# Altium PCB PCB_3636_v3.pcbdoc
Units mil, origin at the board's own origin, x right, y up, seen from the top; angles counter-clockwise.
Board outline 2410 x 2240 mil, 2 copper layers (Top Layer, Bottom Layer); 82 components, 59 nets, 271 pads, 132 vias.
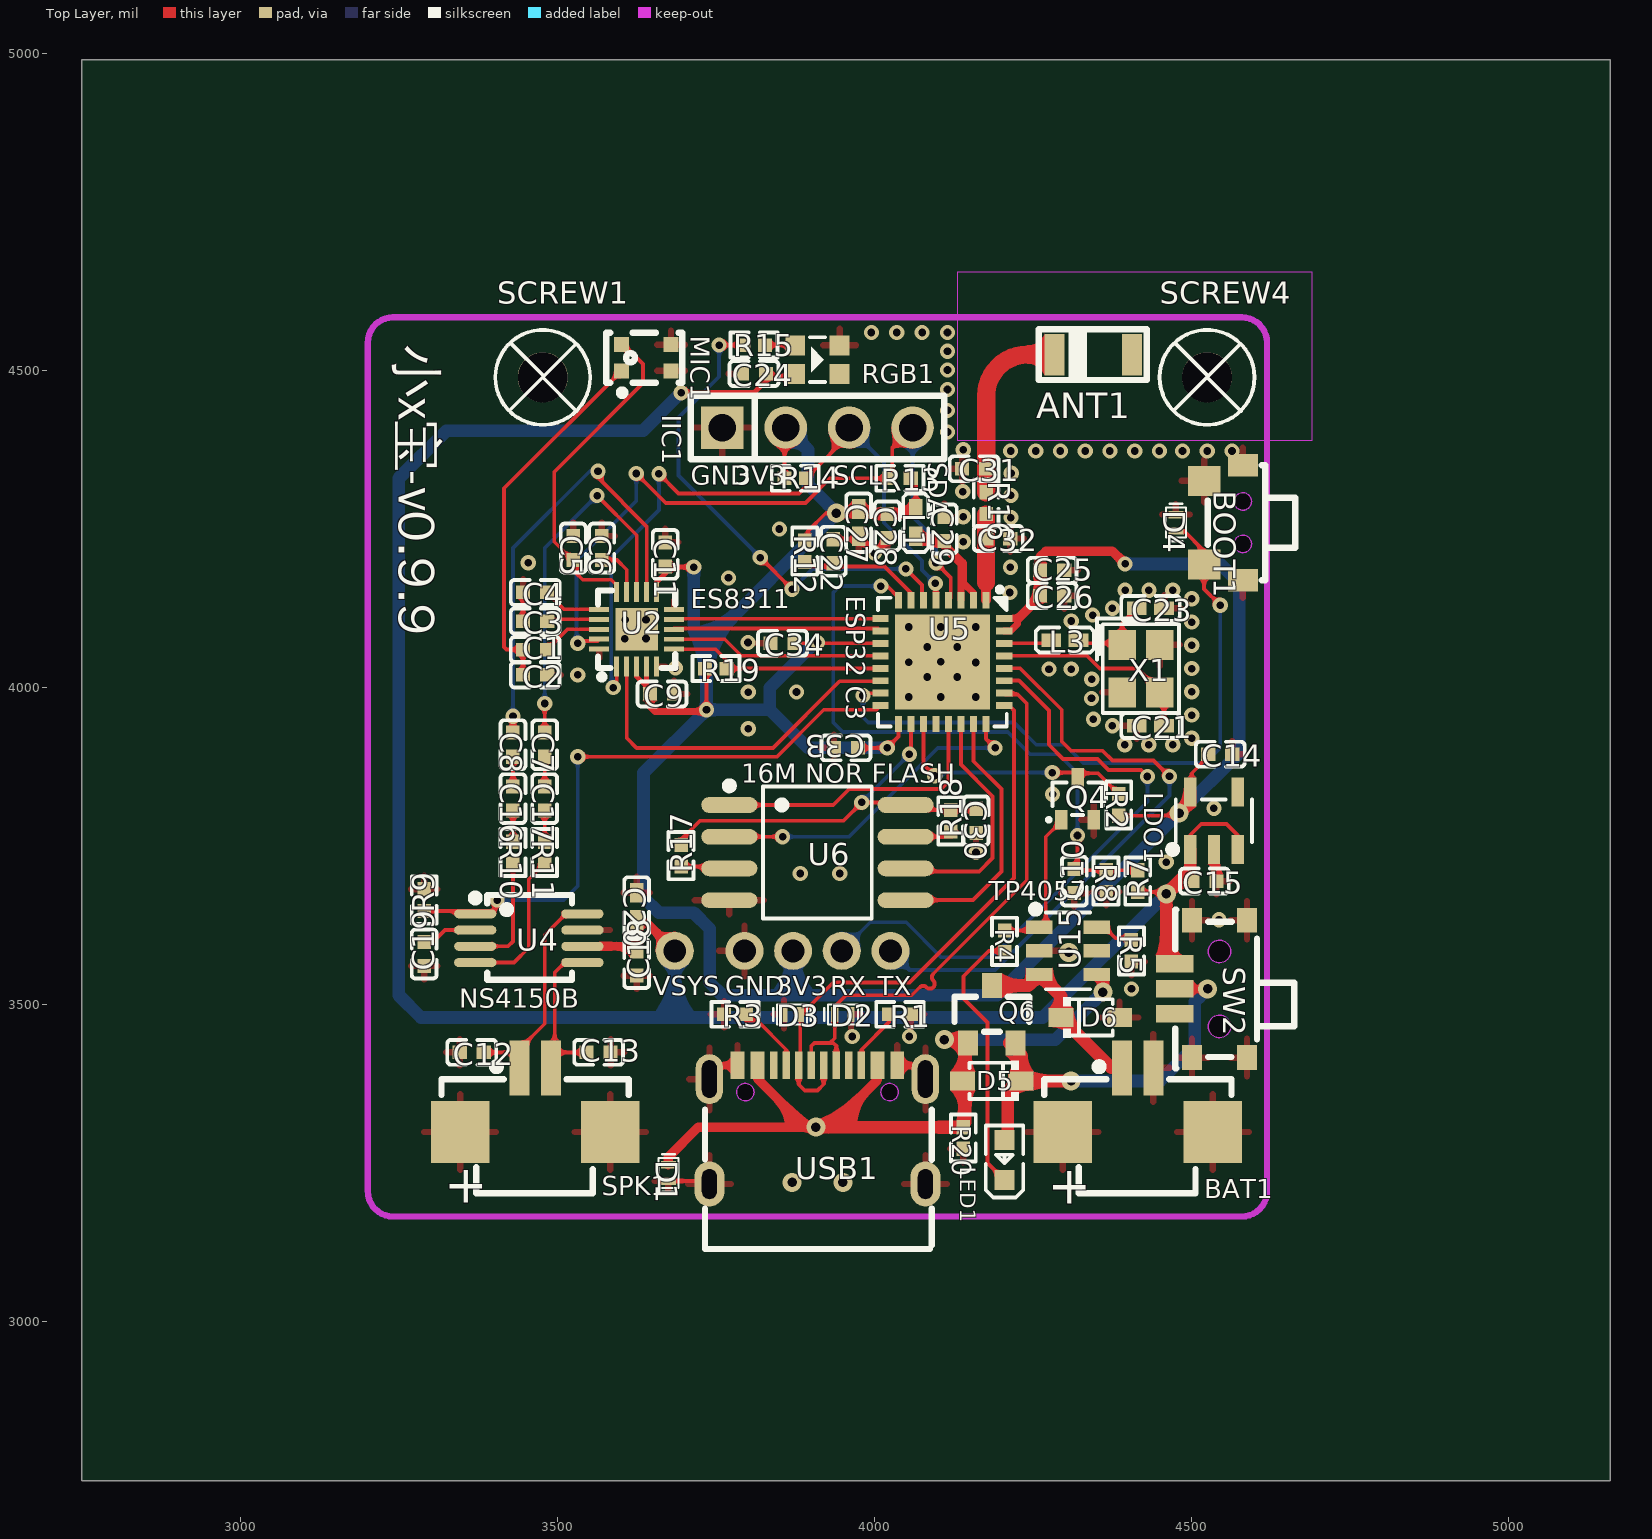
[diagram p0: Top Layer view]
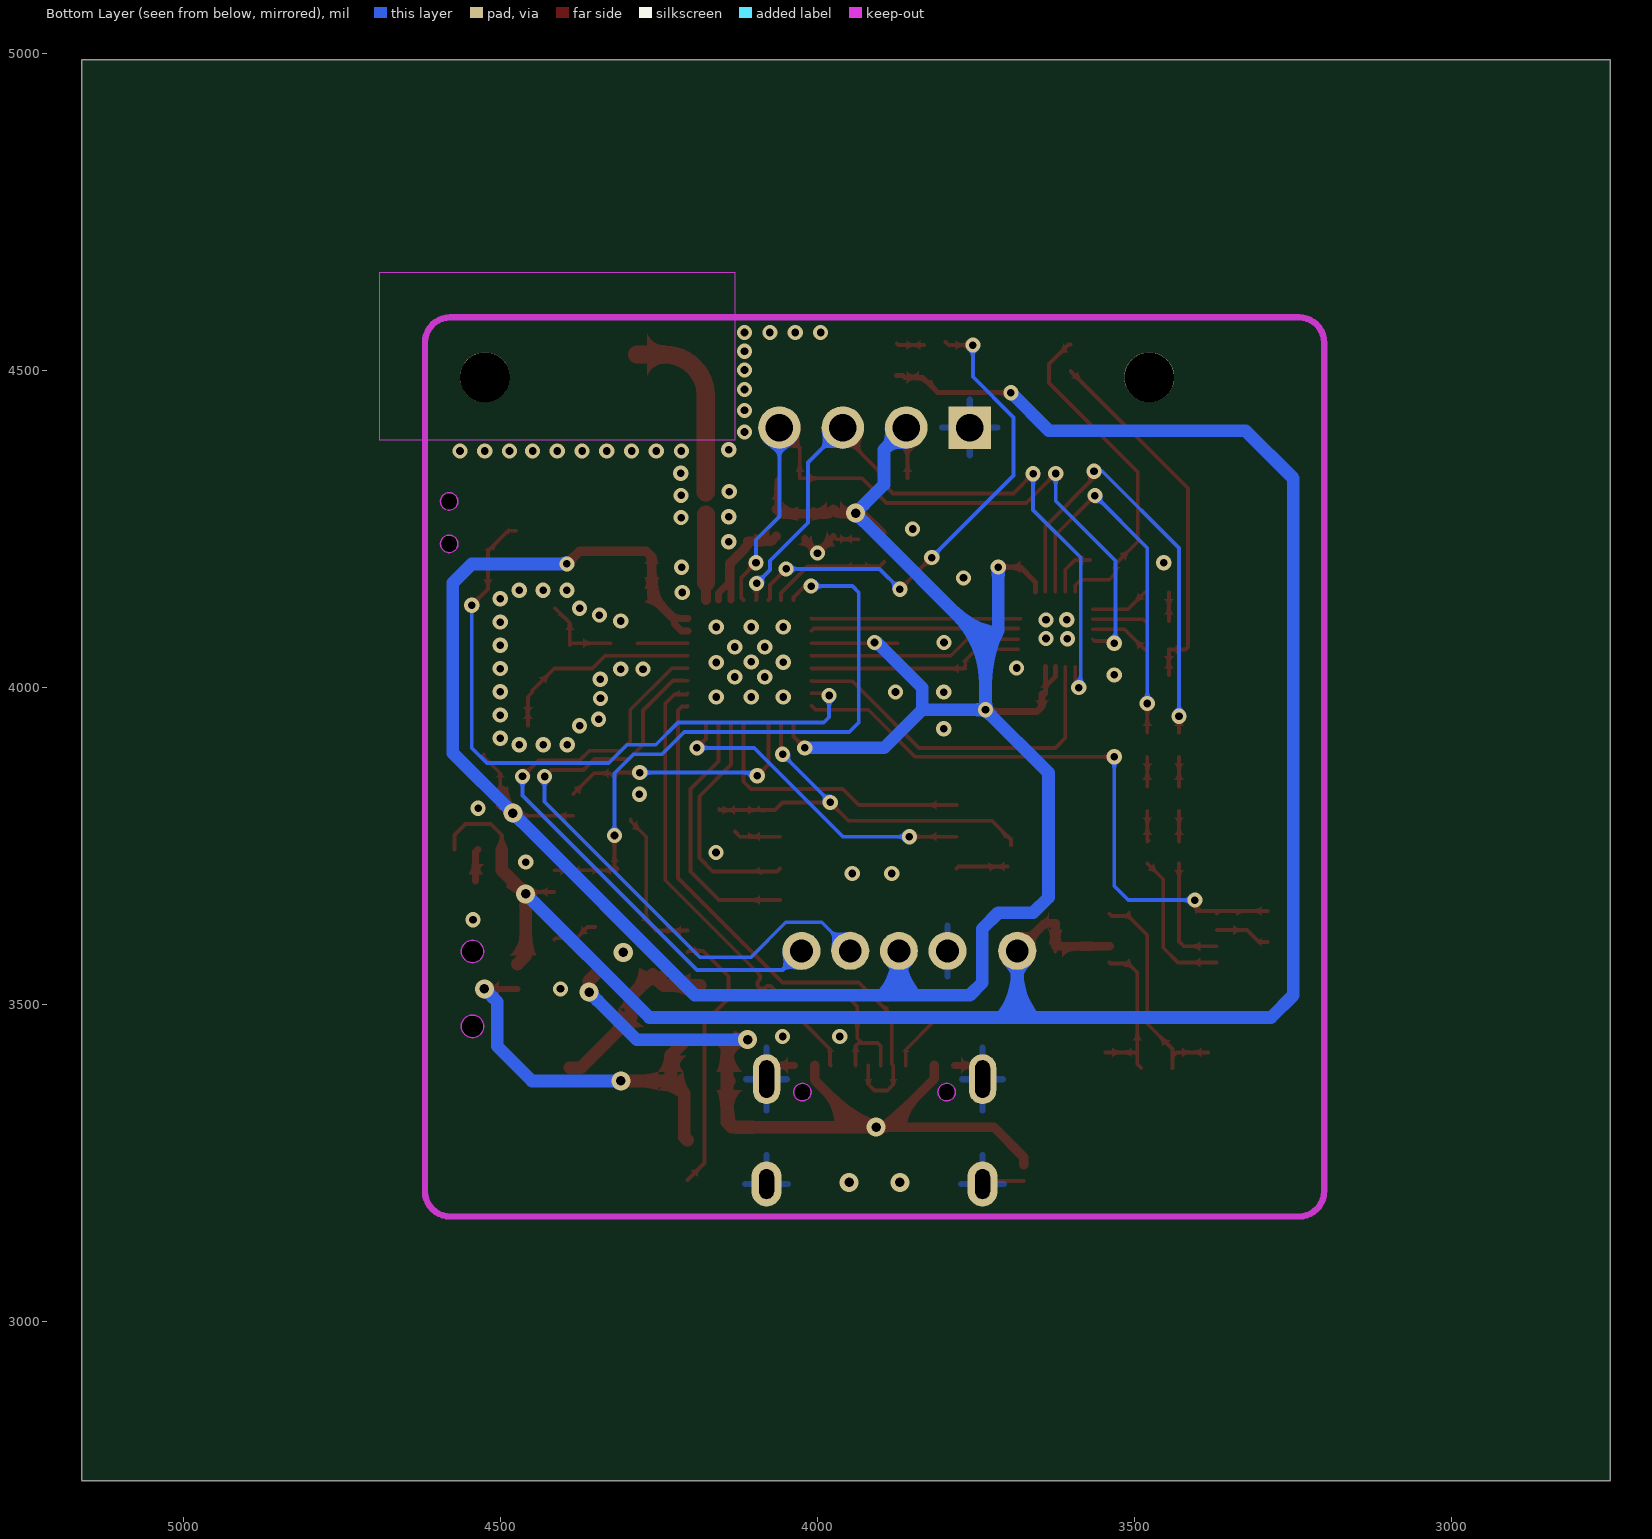
[diagram p1: Bottom Layer view, seen from below]

## Layer stack, top to bottom
Top Layer: signal copper (thickness not stored)
Dielectric: dielectric 12.6, FR-4, Dk 4.8
Bottom Layer: signal copper (thickness not stored)

## Board outline
5160,2750 2750,2750 2750,4990 5160,4990

## Design rules (kind name [scope] priority, off if disabled: settings)
BoardOutlineClearance copperThickness1oz [All] p0: genericclearance=10 ignorepadtopadclearanceinfootprint=FALSE except(0: Arc-SplitContinuation Track-SplitContinuation SMDPad-SplitContinuation THPad-SplitContinuation Via-SplitContinuation Fill-SplitContinuation Poly-SplitContinuation Region-SplitContinuation Text-SplitContinuation; 6: Track-CutoutEdge SMDPad-CutoutEdge THPad-CutoutEdge Via-CutoutEdge Region-CutoutEdge; 11.8: Track-OutlineEdge SMDPad-OutlineEdge THPad-OutlineEdge Via-OutlineEdge Fill-OutlineEdge Region-OutlineEdge Poly-OutlineEdge Text-OutlineEdge Fill-CutoutEdge)
BoardOutlineClearance copperThickness2oz [All] p0: genericclearance=10 ignorepadtopadclearanceinfootprint=FALSE except(0: Arc-SplitContinuation Track-SplitContinuation SMDPad-SplitContinuation THPad-SplitContinuation Via-SplitContinuation Fill-SplitContinuation Poly-SplitContinuation Region-SplitContinuation Text-SplitContinuation; 6: Track-CutoutEdge SMDPad-CutoutEdge THPad-CutoutEdge Via-CutoutEdge Region-CutoutEdge; 11.8: Track-OutlineEdge SMDPad-OutlineEdge THPad-OutlineEdge Via-OutlineEdge Fill-OutlineEdge Region-OutlineEdge Poly-OutlineEdge Text-OutlineEdge Fill-CutoutEdge)
Clearance copperThickness1oz [(InNet('$1N13116') OR InNet('GND') OR InNet('ESP_BOOT') OR InNet('$1N13093') OR InNet('$1N13159') OR InNet('$1N13092') OR InNet('$1N13091') OR InNet('VMIC') OR InNet('$1N13089') OR InNet('$1N13080') OR InNet('PA_IN-') OR InNet('$1N13079') OR InNet('PA_IN+') OR InNet('VDD_3V3') OR InNet('$1N13163') OR InNet('$1N13162') OR InNet('$1N13104') OR InNet('$1N13105') OR InNet('VSYS') OR InNet('$1N13099') OR InNet('$1N13026') OR InNet('CHIP_EN') OR InNet('$1N13175') OR InNet('$1N13022') OR InNet('$1N13025') OR InNet('ESP_VDD_SPI') OR InNet('USB_VBUS') OR InNet('SYS_I2C_SCL') OR InNet('SYS_I2C_SDA') OR InNet('$1N13174') OR InNet('$1N14091') OR InNet('$1N14095') OR InNet('VBAT') OR InNet('$1N12989') OR InNet('$1N12990') OR InNet('PA_EN') OR InNet('$1N13096') OR InNet('$1N13097') OR InNet('$1N13046') OR InNet('$1N13050') OR InNet('I2S_BCK') OR InNet('ESP_RGBLED') OR InNet('$1N14634') OR InNet('$1N14077') OR InNet('I2S_DO') OR InNet('I2S_WS') OR InNet('I2S_DI') OR InNet('I2S_MCK') OR InNet('ESP_SPICS0') OR InNet('ESP_SPICLK') OR InNet('ESP_SPID') OR InNet('ESP_SPIQ') OR InNet('USB_DN') OR InNet('USB_DP') OR InNet('ESP_U0RXD') OR InNet('ESP_U0TXD') OR InNet('ESP_BAT_ADC') OR InNet('ESP_BAT_CHRG') OR InNet('VOUT'))] p1: gap=7 ignorepadtopadclearanceinfootprint=FALSE except(4: Track-Track; 6: Track-SMDPad SMDPad-SMDPad Track-THPad SMDPad-THPad THPad-THPad Track-Via SMDPad-Via THPad-Via Via-Via SMDPad-Fill THPad-Fill Via-Fill Fill-Fill Track-Region SMDPad-Region THPad-Region Via-Region Region-Region Track-Poly SMDPad-Poly THPad-Poly Via-Poly Fill-Poly Region-Poly Poly-Poly Track-Text SMDPad-Text THPad-Text Via-Text Fill-Text Region-Text Poly-Text Text-Text; 6.9: Track-Hole SMDPad-Hole THPad-Hole Via-Hole Fill-Hole Region-Hole Poly-Hole Text-Hole Sheet-Hole; 11.8: Track-Fill Fill-Region Track-Sheet SMDPad-Sheet THPad-Sheet Via-Sheet Fill-Sheet Region-Sheet Poly-Sheet Text-Sheet)
Clearance copperThickness2oz [All] p1: gap=7 ignorepadtopadclearanceinfootprint=FALSE except(6: Track-SMDPad SMDPad-SMDPad Track-THPad SMDPad-THPad THPad-THPad Track-Via SMDPad-Via THPad-Via Via-Via SMDPad-Fill THPad-Fill Via-Fill Fill-Fill Track-Region SMDPad-Region THPad-Region Via-Region Region-Region Track-Poly SMDPad-Poly THPad-Poly Via-Poly Fill-Poly Region-Poly Poly-Poly Track-Text SMDPad-Text THPad-Text Via-Text Fill-Text Region-Text Poly-Text Text-Text; 6.9: Track-Hole SMDPad-Hole THPad-Hole Via-Hole Fill-Hole Region-Hole Poly-Hole Text-Hole Sheet-Hole; 8: Track-Track; 11.8: Track-Fill Fill-Region Track-Sheet SMDPad-Sheet THPad-Sheet Via-Sheet Fill-Sheet Region-Sheet Poly-Sheet Text-Sheet)
DiffPairsRouting differentialPair [All] p1: maxuncoupledlength=10 minlimit=6 maxlimit=6 mostfreqgap=6 toplayer_minwidth=5 toplayer_prefwidth=10 toplayer_maxwidth=100 bottomlayer_minwidth=5 bottomlayer_prefwidth=10 bottomlayer_maxwidth=100
PasteMaskExpansion pasteMaskExpansion [All] p1: expansion=0
PlaneConnect innerPlane [All] p1: planeconnectstyle=Relief reliefexpansion=20 reliefentries=4 reliefconductorwidth=10 reliefairgap=10
PolygonConnect copperRegion [All] p1: connectstyle=Relief reliefentries=4 reliefconductorwidth=10 polygonreliefangle="90 Angle" airgapwidth=10
RoutingVias viaSize [All] p1: viastyle="Through Hole" holewidth=12 minholewidth=11.8 maxholewidth=248 width=24 minwidth=19.7 maxwidth=393.7
SolderMaskExpansion solderMaskExpansion [All] p1: useseparateexpansions=TRUE expansion=2 expansionbottom=2
Width copperThickness1oz [All] p1: maxlimit=100 minlimit=5 preferedwidth=6
Width copperThickness2oz [All] p1: maxlimit=100 minlimit=8 preferedwidth=10

## Components (designator, comment, footprint, x,y, rotation, side; value= is the part's Value field where it differs from the comment)
ANT1 "RFANT3216120A5T" FILTER-SMD_1206-2P-L3.2-W1.6-L 4345,4525 r0 top
BAT1 "HC-1.25-2PWT" CONN-SMD_2P-P1.25-HC-1.25-2PWT 4415,3350 r0 top locked
BOOT1 "TS24CA" SW-SMD_TS24CA 4550,4260 r270 top
C1 "CL05A105KA5NQNC" C0402#1 3465,4060 r0 top
C2 "CL05B104KO5NNNC" C0402#1 3465,4020 r180 top
C3 "CL05A105KA5NQNC" C0402#1 3465,4105 r0 top
C4 "CL05A105KA5NQNC" C0402#1 3465,4150 r0 top
C5 "CL05A105KA5NQNC" C0402#1 3525,4220 r270 top
C6 "CL05A105KA5NQNC" C0402#1 3570,4220 r270 top
C7 "CL05A105KA5NQNC" C0402#1 3480,3910 r90 top
C8 "CL05A105KA5NQNC" C0402#1 3430,3910 r90 top
C9 "CL05B104KO5NNNC" C0402#1 3665,3990 r180 top
C10 "CL05B104KO5NNNC" C0402#1 4315,3695 r90 top
C11 "CL05A105KA5NQNC" C0402#1 3670,4210 r270 top
C12 "0402B102K500NT" C0402#1 3365,3425 r180 top
C13 "0402B102K500NT" C0402#1 3565,3425 r0 top
C14 "CL05A105KA5NQNC" C0402#1 4545,3895 r180 top
C15 "CL05A105KA5NQNC" C0402#1 4520,3695 r0 top
C16 "CL05B104KO5NNNC" C0402#1 3430,3825 r270 top
C17 "CL05B104KO5NNNC" C0402#1 3480,3825 r270 top
C18 "CL05A105KA5NQNC" C0402#1 3625,3565 r90 top
C19 "CL05A105KA5NQNC" C0402#1 3290,3580 r90 top
C20 "CL05A106MQ5NUNC" C0402#2 3625,3655 r270 top
C21 "CL05C100JB5NNNC" C0402#2 4435,3940 r180 top
C22 "CL05B104KO5NNNC" C0402#1 3935,4215 r90 top
C23 "CL05C100JB5NNNC" C0402#2 4435,4125 r0 top
C24 "CL05B104KO5NNNC" C0402#1 3810,4495 r0 top
C25 "CL05A105KA5NQNC" C0402#1 4280,4185 r0 top
C26 "CL05B104KO5NNNC" C0402#1 4280,4145 r0 top
C27 "CL05A106MQ5NUNC" C0402#2 3975,4260 r90 top
C28 "CL05B104KO5NNNC" C0402#1 4020,4255 r270 top
C29 "CL05B104KO5NNNC" C0402#1 4110,4250 r90 top
C30 "CL05A105KA5NQNC" C0402#1 4160,3790 r90 top
C31 "CL05B104KO5NNNC" C0402#1 4157,4345 r180 top
C32 "CL05B104KO5NNNC" C0402#1 4195,4235 r0 top
C33 "CL05B104KO5NNNC" C0402#1 3955,3905 r180 top
C34 "CL05B104KO5NNNC" C0402#1 3855,4070 r180 top
D1 "H5VL10B" SOD-882_L1.0-W0.6-BI 3675,3235 r270 top
D2 "H5VL10B" SOD-882_L1.0-W0.6-BI 3950,3485 r0 top
D3 "H5VL10B" SOD-882_L1.0-W0.6-BI 3870,3485 r180 top
D4 "H5VL10B" SOD-882_L1.0-W0.6-BI 4475,4260 r90 top
D5 "1N5819WS_C191023" SOD-323_L1.8-W1.3-LS2.5-RD 4185,3380 r180 top
D6 "1N5819WS_C191023" SOD-323_L1.8-W1.3-LS2.5-RD 4340,3480 r0 top
IIC1 "PZ254V-11-04P" HDR-TH_4P-P2.54-V-M 3910,4410 r0 top
L1 "LQG15HS2N0S02D" L0402 4065,4260 r270 top
L3 "SDCL1005C24NJTDF" L0402-RD 4300,4075 r180 top
LDO1 "RT9013-33GB" SOT-23-5_L3.0-W1.7-P0.95-LS2.8-BL 4535,3790 r0 top
LED1 "KT-0603R" LED0603-RD 4205,3255 r90 top
MIC1 "ZTS6216" MIC-SMD_4P-L2.8-W1.9-P1.84-TL 3640,4520 r90 top
Q4 "SI1304BDL" SOT-323-3_L2.0-W1.3-P1.30-LS2.1-BL 4320,3825 r0 top
Q6 "AO3401A_C347476" SOT-23_L2.9-W1.3-P1.90-LS2.4-BR 4185,3485 r270 top
R1 "0402WGF5101TCE" R0402 4040,3485 r0 top
R2 "0402WGF1004TCE" R0402 4385,3815 r90 top
R3 "0402WGF5101TCE" R0402 3780,3485 r180 top
R4 "0402WGF1002TCE" R0402 4205,3600 r90 top
R5 "0402WGF5101TCE" R0402 4405,3585 r270 top
R7 "0402WGF1003TCE" R0402 4415,3695 r90 top
R8 "0402WGF1003TCE" R0402 4365,3695 r270 top
R9 "0402WGF1002TCE" R0402 3290,3665 r90 top
R10 "0402WGF1003TCE" R0402 3430,3740 r90 top
R11 "0402WGF1003TCE" R0402 3480,3740 r90 top
R12 "0402WGF1002TCE" R0402 3890,4215 r270 top
R13 "0402WGF2201TCE" R0402 4040,4330 r0 top
R14 "0402WGF2201TCE" R0402 3875,4330 r180 top
R15 "0402WGF5100TCE" R0402 3810,4540 r180 top
R16 "0402WGF0000TCE" R0402 4176,4291 r270 top
R17 "0402WGF1003TCE" R0402 3695,3735 r90 top
R18 "0402WGF1003TCE" R0402 4120,3790 r90 top
R19 "0402WGF1002TCE" R0402 3750,4030 r0 top
R20 "0402WGF1003TCE" R0402 4140,3290 r270 top
RGB1 "XL-0807RGBC-WS2812B" LED-SMD_4P-L2.0-W1.8_CY-0807 3910,4517 r180 top
SCREW1 "M2螺丝" M2螺丝 3476.93,4489.17 r0 top
SCREW4 "M2螺丝" M2螺丝 4524.17,4489.17 r0 top
SPK1 "HC-1.25-2PWT" CONN-SMD_2P-P1.25-HC-1.25-2PWT 3465,3350 r0 top locked
SW2 "MINI MSK12CO2" SW-SMD_MSK12CO2 4530,3525 r90 top
U2 "ES8311" WQFN-20_L3.0-W3.0-P0.40-BL-EP1.7 3625,4092 r0 top
U4 "NS4150B_C189961" MSOP-8_L3.0-W3.0-P0.65-LS5.0-BL 3455,3605 r270 top
U5 "ESP32-C3" QFN-32_L5.0-W5.0-P0.50-TL-EP3.7 4106.85,4040.35 r270 top
U6 "W25Q128JVSIQ" SOIC-8_L5.3-W5.3-P1.27-LS8.0-BL 3910,3740 r270 top
U15 "TP4057-MS" SOT-23-6_L2.9-W1.6-P0.95-LS2.8-BL 4305,3585 r270 top
USB1 "TYPE-C 16PIN 2MD(073)" USB-C-SMD_TYPE-C-6PIN-2MD-073 3910,3310.94 r0 top locked
X1 "X252040MMB4SI" CRYSTAL-SMD_4P-L2.5-W2.0-BL 4420,4030 r270 top

## Footprints (in the part's own frame and the unit in brackets; to place one, negate y for a bottom-side part, rotate by r counter-clockwise, add the part's x,y. Pads: shape width x height; smd on the part's side, far side on the other; paste and mask are expansions set on the pad)
C0402#1 [mm]
  rect 0.566x0.54 smd: 1(-0.482,0) 2(0.482,0)
  silkscreen extent -0.98,-0.5 0.98,0.5
C0402#2 [mm]
  rect 0.79x0.54 smd: 1(-0.545,0) 2(0.545,0)
  silkscreen extent -1.17,-0.5 1.17,0.5
CONN-SMD_2P-P1.25-HC-1.25-2PWT [mm]
  rect 0.8x2.2 smd: 1(-0.625,1.285) 2(0.625,1.285)
  rect 2.35x2.5 smd: 3(-3.005,-1.285) 4(3.005,-1.285)
  silkscreen extent -3.75,-3.73 3.75,1.48
CRYSTAL-SMD_4P-L2.5-W2.0-BL [mm]
  rect 1.2x1.1 smd: 1(-0.95,-0.75) 2(0.95,-0.75) 3(0.95,0.75) 4(-0.95,0.75)
  silkscreen extent -2.01,-1.76 1.78,1.53
FILTER-SMD_1206-2P-L3.2-W1.6-L [mm]
  rect 0.8x1.66 smd: 1(-1.55,0) 2(1.55,0)
  silkscreen extent -2.19,-1.02 2.13,1.02
HDR-TH_4P-P2.54-V-M [mm]
  rect 1.7x1.7 hole 1.1: 1(-3.81,0)
  round 1.7 hole 1.1: 2(-1.27,0) 3(1.27,0) 4(3.81,0)
  silkscreen extent -5.08,-1.27 5.08,1.27
L0402 [mm]
  rect 0.79x0.54 smd: 1(-0.545,0) 2(0.545,0)
  silkscreen extent -1.17,-0.5 1.17,0.5
L0402-RD [mm]
  rect 0.79x0.54 smd: 1(-0.545,0) 2(0.545,0)
  silkscreen extent -1.4,-0.57 1.17,0.57
LED0603-RD [mm]
  rect 0.8x0.8 smd: 1(-0.799,0) 2(0.799,0)
  silkscreen extent -1.49,-0.75 1.39,0.76
LED-SMD_4P-L2.0-W1.8_CY-0807 [mm]
  rect 0.8x0.8 smd: 1(0.889,0.575) 2(-0.889,0.575) 3(-0.889,-0.575) 4(0.889,-0.575)
  silkscreen extent -0.31,-0.9 0.31,0.9
M2螺丝 [mm]
  round 2 hole 2: 1(0,0)
  silkscreen extent -1.9,-1.9 1.9,1.9
MIC-SMD_4P-L2.8-W1.9-P1.84-TL [mm]
  rect 0.6x0.6 smd: 1(-0.525,0.995) 2(-0.525,-0.995) 3(0.525,-0.995) 4(0.525,0.995)
  silkscreen extent -1.52,-1.45 1,1.6
MSOP-8_L3.0-W3.0-P0.65-LS5.0-BL [mil]
  oval 14.33x66.61 smd: 1(-38.39,-84.49) 2(-12.79,-84.49) 3(12.8,-84.49) 4(38.39,-84.49) 5(38.39,84.49) 6(12.8,84.49) 7(-12.79,84.49) 8(-38.39,84.49)
  silkscreen extent -69,-90 65,68
QFN-32_L5.0-W5.0-P0.50-TL-EP3.7 [mm]
  rect 0.65x0.28 smd: 1(-2.478,1.75) 2(-2.478,1.25) 3(-2.478,0.75) 4(-2.478,0.25) 5(-2.478,-0.25) 6(-2.478,-0.75) 7(-2.478,-1.25) 8(-2.478,-1.75) 17(2.478,-1.75) 18(2.478,-1.25) 19(2.478,-0.75) 20(2.478,-0.25) 21(2.478,0.25) 22(2.478,0.75) 23(2.478,1.25) 24(2.478,1.75)
  rect 0.28x0.65 smd: 9(-1.75,-2.478) 10(-1.25,-2.478) 11(-0.75,-2.478) 12(-0.25,-2.478) 13(0.25,-2.478) 14(0.75,-2.478) 15(1.25,-2.478) 16(1.75,-2.478) 25(1.75,2.478) 26(1.25,2.478) 27(0.75,2.478) 28(0.25,2.478) 29(-0.25,2.478) 30(-0.75,2.478) 31(-1.25,2.478) 32(-1.75,2.478)
  rect 3.8x3.8 smd: 33(0,0)
  silkscreen extent -3,-2.58 2.58,2.58
R0402 [mm]
  rect 0.566x0.54 smd: 1(-0.433,0) 2(0.433,0)
  silkscreen extent -0.94,-0.5 0.94,0.5
SOD-323_L1.8-W1.3-LS2.5-RD [mm]
  rect 1x0.75 smd: 1(-1.173,0) 2(1.173,0)
  silkscreen extent -1.08,-0.8 0.9,0.8
SOD-882_L1.0-W0.6-BI [mm]
  rect 0.3x0.6 smd: 1(-0.325,0) 2(0.325,0)
  silkscreen extent -0.75,-0.4 0.75,0.4
SOIC-8_L5.3-W5.3-P1.27-LS8.0-BL [mm]
  oval 0.63x2.25 smd: 1(-1.905,-3.53) 2(-0.635,-3.53) 3(0.635,-3.53) 4(1.905,-3.53) 5(1.905,3.53) 6(0.635,3.53) 7(-0.635,3.53) 8(-1.905,3.53)
  silkscreen extent -2.82,-3.68 2.64,2.18
SOT-23-5_L3.0-W1.7-P0.95-LS2.8-BL [mm]
  rect 0.49x1.157 smd: 1(-0.95,-1.154) 2(0,-1.154) 3(0.95,-1.154)
  rect 0.49x1.175 smd: 4(0.95,1.154) 5(-0.95,1.154)
  silkscreen extent -1.8,-1.29 1.53,0.85
SOT-23-6_L2.9-W1.6-P0.95-LS2.8-BL [mil]
  rect 20.95x42.2 smd: 1(-37.4,-45.24) 2(0,-45.24) 3(37.4,-45.24) 4(37.4,45.24) 5(0,45.24) 6(-37.4,45.24)
  silkscreen extent -72,-57 61,35
SOT-23_L2.9-W1.3-P1.90-LS2.4-BR [mm]
  rect 1x0.8 smd: 1(1.15,-0.95) 2(1.15,0.95) 3(-1.15,0)
  silkscreen extent -0.7,-1.5 0.7,1.5
SOT-323-3_L2.0-W1.3-P1.30-LS2.1-BL [mm]
  rect 0.5x0.78 smd: 1(-0.65,-0.84) 2(0.65,-0.84) 3(0,0.84)
  silkscreen extent -1.22,-0.93 1,0.65
SW-SMD_MSK12CO2 [mm]
  rect 0.7x1.5 smd: 1(-1,1.45) 2(0,1.45) 3(1,1.45)
  rect 1x0.8 smd: 4(-2.75,-1.45) 4(-2.75,0.75) 5(2.75,-1.45) 5(2.75,0.75)
  Board Outline Layer circle w0.005: c-1.5,-0.35 r0.45
  Board Outline Layer circle w0.005: c1.5,-0.35 r0.45
  Board Outline Layer region: -1.5,-0.8 -1.695,-0.755 -1.852,-0.631 -1.939,-0.45 -1.939,-0.25 -1.852,-0.069 -1.695,0.055 -1.5,0.1 -1.5,0.1 -1.305,0.055 -1.148,-0.069 -1.061,-0.25 -1.061,-0.45 -1.148,-0.631 -1.305,-0.755 -1.5,-0.8
  Board Outline Layer region: 1.5,-0.8 1.305,-0.755 1.148,-0.631 1.061,-0.45 1.061,-0.25 1.148,-0.069 1.305,0.055 1.5,0.1 1.5,0.1 1.695,0.055 1.852,-0.069 1.939,-0.25 1.939,-0.45 1.852,-0.631 1.695,-0.755 1.5,-0.8
  Multi-Layer board cut-out: -1.5,-0.8 -1.695,-0.755 -1.852,-0.631 -1.939,-0.45 -1.939,-0.25 -1.852,-0.069 -1.695,0.055 -1.5,0.1 -1.5,0.1 -1.305,0.055 -1.148,-0.069 -1.061,-0.25 -1.061,-0.45 -1.148,-0.631 -1.305,-0.755 -1.5,-0.8
  Multi-Layer board cut-out: 1.5,-0.8 1.305,-0.755 1.148,-0.631 1.061,-0.45 1.061,-0.25 1.148,-0.069 1.305,0.055 1.5,0.1 1.5,0.1 1.695,0.055 1.852,-0.069 1.939,-0.25 1.939,-0.45 1.852,-0.631 1.695,-0.755 1.5,-0.8
  silkscreen extent -3.17,-3.35 3.17,1.43
SW-SMD_TS24CA [mm]
  rect 0.9x1.2 smd: 1(-2.3,0.775) 2(2.3,0.775)
  rect 1.2x1.3 smd: 3(-1.675,-0.775) 4(1.675,-0.775)
  Board Outline Layer circle w0.005: c-0.85,0.775 r0.35
  Board Outline Layer circle w0.005: c0.85,0.775 r0.35
  Board Outline Layer region: -0.85,1.125 -0.698,1.09 -0.576,0.993 -0.509,0.853 -0.509,0.697 -0.576,0.557 -0.698,0.46 -0.85,0.425 -0.85,0.425 -1.002,0.46 -1.124,0.557 -1.191,0.697 -1.191,0.853 -1.124,0.993 -1.002,1.09 -0.85,1.125
  Board Outline Layer region: 0.85,1.125 1.002,1.09 1.124,0.993 1.191,0.853 1.191,0.697 1.124,0.557 1.002,0.46 0.85,0.425 0.85,0.425 0.698,0.46 0.576,0.557 0.509,0.697 0.509,0.853 0.576,0.993 0.698,1.09 0.85,1.125
  Multi-Layer board cut-out: -0.85,1.125 -0.698,1.09 -0.576,0.993 -0.509,0.853 -0.509,0.697 -0.576,0.557 -0.698,0.46 -0.85,0.425 -0.85,0.425 -1.002,0.46 -1.124,0.557 -1.191,0.697 -1.191,0.853 -1.124,0.993 -1.002,1.09 -0.85,1.125
  Multi-Layer board cut-out: 0.85,1.125 1.002,1.09 1.124,0.993 1.191,0.853 1.191,0.697 1.124,0.557 1.002,0.46 0.85,0.425 0.85,0.425 0.698,0.46 0.576,0.557 0.509,0.697 0.509,0.853 0.576,0.993 0.698,1.09 0.85,1.125
  silkscreen extent -2.3,-0.62 2.3,2.88
USB-C-SMD_TYPE-C-6PIN-2MD-073 [mm]
  rect 0.55x1.1 smd: 1(-3.2,2.375) 2(-2.4,2.375) 11(2.4,2.375) 12(3.2,2.375)
  rect 0.3x1.1 smd: 3(-1.75,2.375) 4(-1.25,2.375) 5(-0.75,2.375) 6(-0.25,2.375) 7(0.25,2.375) 8(0.75,2.375) 9(1.25,2.375) 10(1.75,2.375)
  oval 1.2x1.8 hole 0.6 slot 1.2 at 90 deg: 13(-4.325,-2.375) 14(4.325,-2.375)
  oval 1.1x2 hole 0.6 slot 1.5 at 90 deg: 13(-4.325,1.825) 14(4.325,1.825)
  Board Outline Layer circle w0.005: c-2.89,1.305 r0.35
  Board Outline Layer circle w0.005: c2.89,1.305 r0.35
  Board Outline Layer region: -2.54,1.305 -2.575,1.153 -2.672,1.031 -2.812,0.964 -2.968,0.964 -3.108,1.031 -3.205,1.153 -3.24,1.305 -3.24,1.305 -3.205,1.457 -3.108,1.579 -2.968,1.646 -2.812,1.646 -2.672,1.579 -2.575,1.457 -2.54,1.305
  Board Outline Layer region: 3.24,1.305 3.205,1.153 3.108,1.031 2.968,0.964 2.812,0.964 2.672,1.031 2.575,1.153 2.54,1.305 2.54,1.305 2.575,1.457 2.672,1.579 2.812,1.646 2.968,1.646 3.108,1.579 3.205,1.457 3.24,1.305
  Multi-Layer board cut-out: -2.54,1.305 -2.575,1.153 -2.672,1.031 -2.812,0.964 -2.968,0.964 -3.108,1.031 -3.205,1.153 -3.24,1.305 -3.24,1.305 -3.205,1.457 -3.108,1.579 -2.968,1.646 -2.812,1.646 -2.672,1.579 -2.575,1.457 -2.54,1.305
  Multi-Layer board cut-out: 3.24,1.305 3.205,1.153 3.108,1.031 2.968,0.964 2.812,0.964 2.672,1.031 2.575,1.153 2.54,1.305 2.54,1.305 2.575,1.457 2.672,1.579 2.812,1.646 2.968,1.646 3.108,1.579 3.205,1.457 3.24,1.305
  silkscreen extent -4.5,-4.97 4.57,0.6
WQFN-20_L3.0-W3.0-P0.40-BL-EP1.7 [mm]
  rect 0.2x0.8 smd: 1(-0.8,-1.5) 2(-0.4,-1.5) 3(0,-1.5) 4(0.4,-1.5) 5(0.8,-1.5) 11(0.8,1.5) 12(0.4,1.5) 13(0,1.5) 14(-0.4,1.5) 15(-0.8,1.5)
  rect 0.8x0.2 smd: 6(1.5,-0.8) 7(1.5,-0.4) 8(1.5,0) 9(1.5,0.4) 10(1.5,0.8) 16(-1.5,0.8) 17(-1.5,0.4) 18(-1.5,0) 19(-1.5,-0.4) 20(-1.5,-0.8)
  rect 1.7x1.7 smd: 21(0,0)
  silkscreen extent -1.55,-2 1.55,1.55

## Free pads (board coordinates)
  round 60 hole 36: 1(3795,3585) 2(3685,3585) 2(3871.67,3585) 3(3948.33,3585) 4(4025,3585)

## Via types
v1: diameter 24.02, hole 12.01, Top Layer to Bottom Layer, 96 vias
v2: diameter 24, hole 12, Top Layer to Bottom Layer, 25 vias
v3: diameter 30, hole 15, Top Layer to Bottom Layer, 11 vias

## Nets (pads, with @x,y where several pads share a name; then routed paths per layer and width w, separated by ;. In a path a pad name is that pad's centre, name@x,y a point inside that pad or via, vN(x,y) a via of type N, cw(c..) or ccw(c..) an arc to the next point about the centre after c; other vN are vias at no path point)
$1N12989: R1.1 USB1.10 | length 88.8
  Top Layer w6: USB1.10 3980,3405.54 3980,3430 4022.96,3472.96 R1.1@4022.96,3475
$1N12990: R3.1 USB1.4 | length 107.5
  Top Layer w6: R3.1@3797.04,3475 3815,3475 3860.8,3429.2 USB1.4
$1N13022: C29.1 L1.2 U5.2 U5.3 | length 189.9
  Top Layer w11: U5.3 4136.38,4168.62 4138,4167 ; 4140.46,4164.54 4156.06,4149 U5.2
  Top Layer w15: L1.2 4072.5,4231.04 C29.1 4110,4225 4114.49,4220.51 4114.49,4219.43 4138,4195.93 4138,4167
$1N13025: C32.1 R16.2 U5.1 | length 134.8
  Top Layer w16: U5.1 4175.75,4166.06
  Top Layer w28.73: 4175.75,4166.06 R16.2@4175.75,4272.71
$1N13026: C21.1 U5.29 X1.3 | length 326.1
  Top Layer w6: U5.29 4334.81,4050.19 4355,4030 4415,4030 4449.53,3995.47 X1.3 4456.46,3985.67 C21.1
$1N13046: R17.1 U6.3 | length 82.2
  Top Layer w6: R17.1@3700,3717.96 3778.06,3717.96 U6.3@3781.02,3715
$1N13050: R18.1 U6.7 | length 74.3
  Top Layer w6: U6.7@4058.98,3765 4122.04,3765 R18.1@4130,3772.96
$1N13079: C8.2 U2.12 | length 696.9
  Top Layer w6: C8.2 v1(3430,3955) ; v2(3564,4341) 3564,4331 3640.76,4254.24 U2.12
  Bottom Layer w6: v1(3430,3955) 3430,4220 3551,4341 v2(3564,4341)
$1N13080: C7.2 U2.13 | length 585.3
  Top Layer w6: C7.2 v1(3480,3975) ; v2(3562.65,4302.65) 3625.01,4240.3 U2.13
  Bottom Layer w6: v1(3480,3975) 3480,4220 v2(3562.65,4302.65)
$1N13089: C6.2 U2.14 | length 80.3
  Top Layer w6: C6.2 3593.96,4201.04 3609.26,4185.74 U2.14
$1N13091: C4.2 U2.16 | length 93
  Top Layer w6: C4.2 3510.47,4123.49 U2.16
$1N13092: C3.2 U2.17 | length 83.1
  Top Layer w6: C3.2 3486.7,4107.74 U2.17
$1N13093: C1.2 U2.18 | length 95.2
  Top Layer w6: C1.2 3515.97,4092.01 U2.18
$1N13096: R10.1 U4.3 | length 185.7
  Top Layer w6: U4.3 3422.2,3592.2 3430,3600 R10.1
$1N13097: R11.1 U4.4 | length 237.5
  Top Layer w6: U4.4 3431.61,3566.61 3455,3590 3455,3697.96 R11.1
$1N13099: C19.2 U4.2 | length 88.3
  Top Layer w6: C19.2 3303.96,3598.96 3322.79,3617.79 U4.2
$1N13104: C16.2 R10.2 | length 49
  Top Layer w6: R10.2 C16.2
$1N13105: C17.2 R11.2 | length 50.4
  Top Layer w6: R11.2 3478.26,3758.78 3480,3760.53 C17.2
$1N13116: ANT1.1 C31.1 R16.1 | length 297
  Top Layer w28.73: R16.1 C31.1 4176,4460 cw(c4241,4460) 4241,4525 ANT1.1
$1N13159: C1.1 C2.2 MIC1.1 | length 583.8
  Top Layer w6: C2.2 C1.1 3420,4060 3415.76,4064.24 3415.76,4314.26 MIC1.1
$1N13162: C13.1 SPK1.2 U4.5 | length 255.1
  Top Layer w6: SPK1.2 3495.76,3406.74 SPK1.2@3495.76,3420.76 ; U4.5 3537.88,3565 3510,3565 3495.76,3550.76 SPK1.2@3495.76,3420.76 ; C13.1 3500,3425 SPK1.2@3495.76,3420.76
$1N13163: C12.1 SPK1.1 U4.8 | length 358.3
  Top Layer w6: C12.1 3433.8,3425 SPK1.1@3440.39,3418.41 ; SPK1.1 SPK1.1@3440.39,3418.41 ; U4.8 3536.1,3640 3510,3640 3480,3610 3480,3470 3440.39,3430.39 SPK1.1@3440.39,3418.41
$1N13174: L3.2 U5.30 | length 79.2
  Top Layer w6: U5.30 4283.42,4069.88 L3.2@4283.54,4070
$1N13175: C23.1 L3.1 X1.1 | length 132.2
  Top Layer w6: L3.1@4326.46,4070 4387.87,4070 X1.1 4390.47,4101.93 C23.1
$1N14077: R5.1 U15.6 | length 72.8
  Top Layer w6: U15.6 4362.6,3622.4 4380,3605 4412.96,3605 R5.1@4415,3602.96
$1N14091: LED1.1 R4.1 | length 430.8
  Top Layer w6: LED1.1 4178,3250.53 4178,3472 4140,3510 4140,3545 4180,3585 4202.96,3585 R4.1
$1N14095: Q4.1 R4.2 U15.1 | length 240.9
  Top Layer w6: R4.2 4254.4,3617.04 U15.1 4270,3632.64 4270,3765 4294.41,3789.41 Q4.1
$1N14634: R15.1 RGB1.4 | length 44.1
  Top Layer w6: R15.1@3832.04,4540 3872.36,4540 RGB1.4@3875,4542.64
CHIP_EN: C22.1 R12.2 U5.7 | length 194.2
  Top Layer w6: R12.2@3895,4197.96 3901.92,4191.04 4015.82,4191.04 4057.64,4149.22 U5.7
ESP_BAT_ADC: C10.2 R7.2 R8.1 U5.8 | length 995.7
  Top Layer w6: v1(4010,4160) 4020,4160 4037.95,4142.05 U5.8 ; v2(4320,3766.87) 4320,3718.96 C10.2 4316.92,3712.04 R8.1 R7.2
  Bottom Layer w6: v1(4010,4160) 3945,4160 3935,4150 3935,3945 3950,3930 4210,3930 4245,3895 4290,3895 4320,3865 v2(4320,3766.87)
ESP_BAT_CHRG: Q4.3 R2.2 U5.19 | length 400.2
  Top Layer w6: U5.19 4077.32,3878.67 v1(4095,3860.99) ; v1(4280,3865.99) 4314.01,3865.99 Q4.3@4320,3860 ; Q4.3 4326.93,3865 4352.04,3865 R2.2
  Bottom Layer w6: v1(4095,3860.99) 4100,3865.99 v1(4280,3865.99)
ESP_BOOT: BOOT1.4 D4.1 U5.15 | length 1045.3
  Top Layer w6: v1(3981.63,3987.53) 3985.25,3991.14 U5.15 ; D4.1 4487.8,4247.2 4519.49,4215.51 BOOT1.4 4519.49,4155.51 v2(4545,4130)
  Bottom Layer w6: v1(3981.63,3987.53) 3981.63,3953.37 3990,3945 4220,3945 4255,3910 4300,3910 4329,3881 4521,3881 4545,3905 v2(4545,4130)
ESP_RGBLED: R15.2 U5.6 | length 784.4
  Top Layer w6: v1(3755,4540) R15.2 R15.2@3797.96,4545 ; v1(3820,4205) v1(3870,4155) ; v1(4049.43,4187.11) 4075,4161.55 4075,4140.21 U5.6
  Bottom Layer w6: v1(3755,4540) 3755,4490 3690.76,4425.76 3690.76,4334.24 v1(3820,4205) ; v1(3870,4155) 3902.11,4187.11 v1(4049.43,4187.11)
ESP_SPICLK: U5.22 U6.6 | length 370.3
  Top Layer w6: U6.6@4058.98,3715 4063.98,3710 4165,3710 4186.18,3731.18 4186.18,3828.82 4136.38,3878.62 U5.22
ESP_SPICS0: U5.21 U6.1 | length 442
  Top Layer w6: U6.1@3781.02,3815 3935,3815 3960,3840 4105,3840 4116.69,3851.69 U5.21
ESP_SPID: U5.23 U6.5 | length 410.7
  Top Layer w6: U6.5@4058.98,3665 4155,3665 4200,3710 4200,3840 4156.06,3883.94 U5.23
ESP_SPIQ: U5.24 U6.2 | length 510.7
  Top Layer w6: U6.2@3781.02,3765 v1(3855,3765) ; U5.24 4175.75,3919.25 v1(4190,3905)
  Bottom Layer w6: v1(3855,3765) 3959.69,3765 4099.69,3905 v1(4190,3905)
ESP_U0RXD: pad.3 U5.27 | length 984.9
  Top Layer w6: U5.27 4210.42,4010.82 4211.06,4011.46 4227.47,4011.46 4275,3963.93 4275,3910 4297.31,3887.69 4351.24,3887.69 4368.93,3870 4420,3870 v2(4430.15,3859.85)
  Bottom Layer w6: pad.3 3993.33,3630 4050,3630 4105,3575 4185,3575 4430.15,3820.15 v2(4430.15,3859.85)
ESP_U0TXD: pad.4 U5.28 | length 956.9
  Top Layer w6: U5.28 4229.49,4030.51 4295,3965 4295,3915 4309.52,3900.48 4359.52,3900.48 4375,3885 4440,3885 v2(4465,3860)
  Bottom Layer w6: pad.4 4055,3555 4190,3555 4465,3830 v2(4465,3860)
ESP_VDD_SPI: C30.2 R17.2 R18.2 U5.18 U6.8 | length 655
  Top Layer w6: R17.2 3695,3760 3725,3790 3950.99,3790 v1(3980,3819.01) 4054.97,3819.01 4066.94,3807.04 R18.2 4154.72,3807.04 C30.2@4154.72,3808.96 ; v1(4055,3895) 4057.64,3897.64 U5.18
  Bottom Layer w6: v1(3980,3819.01) 3980,3820 v1(4055,3895)
GND: BAT1.2 BAT1.3 BAT1.4 BOOT1.1 BOOT1.2 BOOT1.3 C2.1 C3.1 C4.1 C5.1 C6.1 C9.1 C10.1 C11.1 C12.2 C13.2 C14.1 C15.2 C18.1 C19.1 C20.1 C21.2 C22.2 C23.2 C24.1 C25.2 C26.2 C27.1 C28.2 C29.2 C30.1 C31.2 C32.2 C33.2 C34.2 D1.2 D2.2 D3.2 D4.2 D6.2 IIC1.1 LDO1.2 MIC1.2 MIC1.3 pad.1 Q4.2 R1.2 R3.2 R5.2 R8.2 R9.2 R20.2 RGB1.3 SPK1.3 SPK1.4 SW2.4 SW2.5 U2.5 U2.10 U2.20 U2.21 U4.7 U5.33 U6.4 U15.2 USB1.1 USB1.12 USB1.13 USB1.14 X1.2 X1.4 | length 381.2
  Top Layer w6: C3.1 C4.1 ; D1.2 3734.96,3222.2 cw(c3734.96,3217.44) USB1.13@3739.72,3217.44 ; C22.2 3970.42,4233.96 C27.1
  Top Layer w10: C27.1 4000,4213.54 v1(4000,4212.03) 4020,4232.03 C28.2
  Top Layer w11: USB1.13@3739.72,3382.8 3761.38,3404.45 USB1.1 ; USB1.12 4058.62,3404.45 USB1.14@4080.28,3382.8 ; LDO1.2 4538.96,3740.62 C15.2
  other v1: 4543,3634 3883.05,3706.91 3945,3706.91 4160,3740 4535,3810 4394.36,3910 4432.18,3910 4470,3910 4500,3920 3801,3935 4375,3940 4345,3950 4500,3956.67 4342,3983 3801,3992.99 3877,3993 4500,3993.33 4342.5,4013.11 3532,4020 4275,4029.19 4310,4029.19 4500,4030 3686.02,4030.98 4500,4066.67 3800.56,4071.19 3606,4077 3639.65,4077.35 4500,4103.33 4310,4105 3607.01,4107 3639.8,4106.79 4343.8,4114.3 4375,4125 4500,4140 4395,4153.62 4432.5,4153.62 4470,4153.62 3769.82,4173 4214.2,4189.63 3453.99,4197 4140,4230 3850,4250 4214.99,4267.97 4140,4269.5 4215,4302.98 4138.99,4309 4215.48,4337.99 4214.49,4373 4254.01,4373 4293.02,4373 4332.03,4373 4371.03,4373 4410.04,4373 4449.05,4373 4485.49,4373 4524.5,4373 4563.5,4373 4140,4375 4115,4403 4115,4437 4115,4470 4115,4500.62 4115,4530.24 3995,4559.85 4035,4559.85 4075,4559.85 4115,4559.85
  other v2: 3965,3450 4055,3450 4405,3525 4460,3725 4280.63,3831.89 4054.07,3985.25 4104.24,3985.25 4159.41,3985.25 4083.23,4016.73 4130.47,4016.73 4054.07,4040.11 4159.41,4039.68 4104.24,4040.6 4083.23,4063.97 4130.47,4063.97 4054.07,4095.49 4104.24,4095.49 4159.41,4095.49 4213,4150
  other v3: 3870,3220 3950,3220 4306.16,3582.64
I2S_BCK: R19.2 U2.6 U5.13 | length 347.1
  Top Layer w6: U2.6 3749.51,4060.49 3767.04,4042.96 R19.2@3767.04,4033.49 ; R19.2 R19.2@3767.04,4033.49 ; U5.13 4008.8,4030 3770.53,4030 R19.2@3767.04,4033.49
I2S_DI: U2.7 U5.12 | length 336
  Top Layer w6: U2.7 3763.76,4076.24 3789.81,4050.19 U5.12
I2S_DO: U2.9 U5.9 | length 329.6
  Top Layer w6: U2.9@3680,4108.56 4008.62,4108.56 U5.9
I2S_MCK: U2.2 U5.14 | length 562.6
  Top Layer w6: U2.2 3609.26,3920.74 3625,3905 3840,3905 3945,4010 4008.49,4010 U5.14
I2S_WS: U2.8 U5.10 | length 326.7
  Top Layer w6: U2.8@3684.05,4092.99 4005.88,4092.99 U5.10
PA_EN: R9.1 U4.1 U5.16 | length 985.1
  Top Layer w6: R9.1 U4.1@3365.94,3647.96 ; U4.1 U4.1@3365.94,3647.96 ; v1(3405,3665) 3405,3655 3397.96,3647.96 U4.1@3365.94,3647.96 ; v1(3532,3891) 3846,3891 3920,3965 4002.86,3965 U5.16
  Bottom Layer w6: v1(3405,3665) 3510,3665 3532,3687 v1(3532,3891)
PA_IN+: C8.1 C16.1 | length 47.1
  Top Layer w6: C16.1 C8.1
PA_IN-: C7.1 C17.1 | length 47.1
  Top Layer w6: C17.1 C7.1
SYS_I2C_SCL: IIC1.3 R14.1 U2.1 U5.5 | length 1104
  Top Layer w6: v1(3588.26,4000) 3593.51,4005.24 U2.1 ; v1(3660,4337.04) 3691,4306.04 3881.04,4306.04 3892.04,4317.04 R14.1 3952.7,4390.66 3952.7,4402.7 IIC1.3 ; v1(4095.97,4164.32) 4095.97,4138.94 U5.5
  Bottom Layer w6: v1(3588.26,4000) 3585,4003.26 3585,4205 3660,4280 v1(3660,4337.04) ; IIC1.3 4015,4355 4015,4260 4075,4200 4075,4185.29 v1(4095.97,4164.32)
SYS_I2C_SDA: IIC1.4 R13.1 U2.19 U5.4 | length 1174.5
  Top Layer w6: v1(3532.2,4070) 3535.63,4073.43 3563.12,4073.43 U2.19 ; v1(3624.41,4337.59) 3670.95,4291.05 3891.05,4291.05 3930,4330 4027.96,4330 4027.96,4377.96 IIC1.4 ; v1(4096.97,4196.84) 4120,4173.8 4120,4141.2 U5.4
  Bottom Layer w6: v1(3532.2,4070) 3530,4072.2 3530,4200 3624.41,4294.41 v1(3624.41,4337.59) ; IIC1.4 4060,4270 4096.97,4233.03 v1(4096.97,4196.84)
USB_DN: D3.1 U5.25 USB1.5 USB1.7 | length 896.1
  Top Layer w6: USB1.7 3919.84,3374.84 3910,3365 3890,3365 3880.47,3374.53 USB1.5 3882.8,3406.77 3882.8,3470 3885,3472.2 3885,3485 3935,3535 4055,3535 4220,3700 4220,3964 4214,3970 4205.84,3970 U5.25
USB_DP: D2.1 U5.26 USB1.6 USB1.8 | length 888.9
  Top Layer w6: USB1.6 3900.16,3435 3905.16,3440 3930,3440 ; USB1.8 3940,3404.92 3940,3435 3935,3440 3930,3440 ; U5.26 4206.29,3989.24 4225.76,3989.24 4240,3975 4240,3696.28 4092.53,3548.81 ccw(c4097.84,3543.51) 4092.53,3538.2 cw(c4087.23,3532.9) 4081.93,3527.6 ccw(c4076.62,3522.29) 4071.32,3527.6 4058.72,3515 3955,3515 3937.2,3497.2 D2.1 3937.2,3447.2 3930,3440
USB_VBUS: D1.1 D5.2 Q6.1 R20.1 U15.4 USB1.2 USB1.11 | length 1237.5
  Top Layer w15: D1.1 3675,3260 3722.09,3307.09 v3(3907.69,3307.09) ; USB1.2 3815.51,3383.41 3888.93,3310 ; 3930,3307.09 4004.49,3381.59 USB1.11
  Top Layer w20: v3(3907.69,3307.09) 3930,3307.09 4135.05,3307.09 4142.6,3314.64 D5.2@4142.6,3376.24 ; v3(4110,3445) 4132.32,3445 Q6.1@4142.6,3434.72 ; D5.2 D5.2@4142.6,3376.24 ; Q6.1 Q6.1@4142.6,3434.72 ; U15.4 4360,3537.84 v3(4360,3520) ; D5.2@4142.6,3376.24 Q6.1@4142.6,3434.72
  Bottom Layer w20: v3(4110,3445) 4285,3445 v3(4360,3520)
VBAT: BAT1.1 D6.1 Q6.3 U15.3 | length 293.1
  Top Layer w20: Q6.3 4242.44,3530.28 U15.3 4293.84,3513.53 D6.1 4373.24,3400.59 BAT1.1
VDD_3V3: C9.2 C11.2 C14.2 C25.1 C26.1 C27.2 C28.1 C33.1 C34.1 IIC1.2 L1.1 LDO1.5 pad.2@3871.67,3585 R2.1 R12.1 R13.2 R14.2 R19.1 U2.3 U2.4 U2.11 U5.11 U5.17 U5.31 U5.32 | length 4645.8
  Top Layer w6: R19.1 3735,4027.96 v1(3735,3965) ; R14.2 3857.96,4407.96 IIC1.2 ; C34.1 3874.08,4069.88 U5.11 ; R12.1@3895,4232.04 3895,4246.99 3923.01,4275 v3@3937.96,4275 ; C33.1 v1(4020,3905) 4037.95,3922.95 U5.17 ; R13.2@4062.04,4330 4065,4327.04 L1.1 ; R2.1 v3@4475.9,3797.96 ; LDO1.5 4500,3837.82 4500,3865 4526.04,3891.04 C14.2
  Top Layer w8: U2.3 3625.01,4017.33 3639.45,4002.88 3640.76,4004.18 ; U2.4 3640.76,4004.18 ; C9.2 3645.76,3989.72 3640.76,3989.72 3640.76,4004.18 ; U2.11 3656.51,4166.51 3680,4190 v1(3715,4190)
  Top Layer w11: C9.2 3646.04,3970 3653.82,3962.22 3732.22,3962.22 v1(3735,3965) ; U5.31 4214.56,4089.56 4225.29,4100.29 4225.29,4109.25 U5.32
  Top Layer w15: v3(3940,4275) 3968.54,4275 C27.2 3982.5,4273.96 C28.1 4057.5,4273.96 L1.1 ; 4225.29,4109.25 4225.9,4108.65 C26.1@4261.04,4143.79 ; C26.1 C25.1 4261.04,4206.04 4270,4215 4375,4215 v1(4395,4195)
  Top Layer w20: v3(4479.98,3802.04) 4497.6,3819.66 LDO1.5
  Bottom Layer w20: v1(3715,4190) 3715,4090 3735,4070 ; IIC1.2 3895,4375 3895,4320 v3(3940,4275) 3735,4070 ; pad.2@3871.67,3585 3871.67,3517.39 3869.28,3515 ; v1(3910,4071.19) 3906.19,4071.19 3835,4000 3835,3965 ; v1(4020,3905) 3895,3905 3835,3965 ; v1(4395,4195) 4545,4195 4575,4165 4575,3897.06 v3(4479.98,3802.04) 4192.94,3515 3869.28,3515 ; v1(3735,3965) 3635.86,3865.86 3635.86,3669.14 3660,3645 3715,3645 3740,3620 3740,3535 3760,3515 3869.28,3515 ; v1(3735,3965) 3835,3965 ; v1(3735,3965) 3735,4070
VMIC: C5.2 MIC1.4 U2.15 | length 531
  Top Layer w6: U2.15 3593.51,4161.49 3585,4170 3540,4170 3530,4180 3530,4195 3495,4230 3495,4340 3635,4480 3635,4510 3604.33,4540.67 MIC1.4
VOUT: D5.1 LED1.2 Q6.2 SW2.2 | length 619.5
  Top Layer w10: SW2.2 v3(4525,3525)
  Top Layer w20: LED1.2 4210,3291.48 4210,3360 4230,3380 D5.1 ; Q6.2@4212.4,3439.72 4231.16,3420.96 D5.1 ; v3(4310,3380) D5.1
  Bottom Layer w20: v3(4310,3380) 4450,3380 4505,3435 4505,3505 v3(4525,3525)
VSYS: C15.1 C18.2 C20.2 C24.2 LDO1.1 LDO1.3 pad.2@3685,3585 R7.1 RGB1.1 SW2.3 U4.6 | length 3493.3
  Top Layer w6: C18.2 C18.2@3625,3592.2 ; R7.1 4457.04,3677.96 v3(4460,3675) ; LDO1.1 4497.6,3767.6 4515,3785 4555,3785 4572.4,3767.6 LDO1.3
  Top Layer w8: v1(3695,4465) 3810,4465 3833.96,4488.96 3862.15,4488.96 3865.55,4492.36 RGB1.1@3875,4492.36
  Top Layer w14: U4.6 3625,3592.2 3625,3628.54 3641.46,3628.54 pad.2@3685,3585
  Top Layer w20: SW2.3 4460,3577.28 v3(4460,3675) 4497.6,3712.6 LDO1.1
  Bottom Layer w20: 3685,3485 pad.2@3685,3575 ; v1(3695,4465) 3635,4405 3325,4405 3250,4330 3250,3515 3285,3480 4265,3480 v3(4460,3675)
pads on no net: ANT1.2 LDO1.4 RGB1.2 SCREW1.1 SCREW4.1 SW2.1 U5.20 U15.5 USB1.3 USB1.9

## Polygon pours and split planes (outlines as drawn)
GND on Top Layer (solid, remove dead copper, pour order 0): 3085,4740 4670,4740 4670,3000 3085,3000
GND on Bottom Layer (solid, remove dead copper, pour order 2): 3000,4630 4910,4630 4910,3110 3000,3110

## Keep-outs
Board Outline Layer:
  region: 4130,4655 4130,4390 4690,4390 4690,4655
  lines w10: 3201.34,3205.71 ccw(c3240.71,3205.71) 3240.71,3166.34 4579.29,3166.34 ccw(c4579.29,3205.71) 4618.66,3205.71 4618.66,4544.29 ccw(c4579.29,4544.29) 4579.29,4583.66 3240.71,4583.66 ccw(c3240.71,4544.29) 3201.34,4544.29 3201.34,3205.71

## Other copper
Top Layer:
  drawing of 207 lines, arcs and shapes, not listed
Bottom Layer:
  region net VDD_3V3: 3881.67,3544.16 3861.67,3544.16 3861.39,3547.48 3860.59,3550.43 3859.36,3553.09 3857.76,3555.54 3855.87,3557.89 3853.76,3560.21 3849.17,3565.16 3894.17,3565.16 3889.58,3560.21 3887.47,3557.89 3885.57,3555.54 3883.97,3553.09 3882.74,3550.43 3881.95,3547.48
  region net ESP_U0RXD: 3975.09,3616 3979.34,3611.76 3978.47,3610.66 3977.81,3609.33 3977.34,3607.81 3977.04,3606.12 3976.83,3602.35 3977.02,3598.24 3977.9,3589.97 3978.24,3586.25 3978.27,3583.12 3946.45,3614.94 3949.58,3614.91 3953.3,3614.57 3961.58,3613.69 3965.68,3613.5 3969.45,3613.7 3971.14,3614.01 3972.67,3614.48 3973.99,3615.14
  region net ESP_U0TXD: 4056,3558.24 4051.76,3554 4050.66,3554.86 4049.33,3555.52 4047.81,3555.99 4046.12,3556.3 4042.35,3556.5 4038.24,3556.31 4029.97,3555.43 4026.25,3555.09 4023.12,3555.06 4054.94,3586.88 4054.91,3583.75 4054.57,3580.03 4053.69,3571.76 4053.5,3567.65 4053.7,3563.88 4054.01,3562.19 4054.48,3560.67 4055.14,3559.34
  region net VSYS: 3695,3544.16 3675,3544.16 3674.72,3547.48 3673.93,3550.43 3672.69,3553.09 3671.09,3555.54 3669.2,3557.89 3667.09,3560.21 3662.5,3565.16 3707.5,3565.16 3702.91,3560.21 3700.8,3557.89 3698.91,3555.54 3697.31,3553.09 3696.07,3550.43 3695.28,3547.48
  region net VDD_3V3: 3899.29,4384.86 3885.14,4370.71 3883.63,4372.1 3882.12,4373.25 3880.61,4374.19 3879.09,4374.94 3877.54,4375.51 3875.98,4375.93 3872.77,4376.42 3869.4,4376.55 3865.83,4376.51 3862.01,4376.47 3857.9,4376.6 3893.4,4412.1 3893.53,4407.99 3893.49,4404.17 3893.45,4400.6 3893.58,4397.23 3894.07,4394.02 3894.49,4392.46 3895.06,4390.91 3895.81,4389.39 3896.75,4387.88 3897.9,4386.37
  region net SYS_I2C_SCL: 3994.34,4379.91 3990.09,4375.66 3988.85,4376.64 3987.36,4377.38 3985.64,4377.9 3983.75,4378.23 3981.69,4378.39 3979.51,4378.42 3974.91,4378.15 3965.62,4377.06 3961.44,4376.65 3957.9,4376.6 3993.4,4412.1 3993.35,4408.56 3992.94,4404.38 3991.85,4395.09 3991.58,4390.49 3991.61,4388.31 3991.77,4386.25 3992.1,4384.36 3992.62,4382.64 3993.36,4381.15
  region net SYS_I2C_SDA: 4063,4364.44 4057,4364.44 4056.81,4366.01 4056.28,4367.59 4055.43,4369.17 4054.32,4370.74 4052.99,4372.31 4051.46,4373.87 4048.02,4376.94 4040.69,4382.74 4037.44,4385.4 4034.9,4387.87 4085.1,4387.87 4082.56,4385.4 4079.31,4382.74 4071.98,4376.94 4068.54,4373.87 4067.01,4372.31 4065.68,4370.74 4064.57,4369.17 4063.72,4367.59 4063.19,4366.01
  region net VSYS: 4452.63,3653.49 4438.49,3667.63 4440.83,3669.65 4442.86,3671.29 4443.68,3672.17 4444.34,3673.18 4444.8,3674.41 4445.03,3675.94 4460.94,3660.03 4459.41,3659.8 4458.18,3659.34 4457.17,3658.68 4456.29,3657.86 4454.65,3655.83
  region net ESP_SPIQ: 4173.65,3902 4173.65,3908 4175.18,3908.13 4176.4,3908.52 4177.41,3909.11 4178.28,3909.88 4179.95,3911.8 4182.06,3914.01 4182.06,3895.99 4179.95,3898.2 4178.28,3900.12 4177.41,3900.89 4176.4,3901.48 4175.18,3901.87
  region net ESP_SPIQ: 3871.35,3768 3871.35,3762 3869.82,3761.87 3868.6,3761.48 3867.59,3760.89 3866.72,3760.12 3865.05,3758.2 3862.94,3755.99 3862.94,3774.01 3865.05,3771.8 3866.72,3769.88 3867.59,3769.11 3868.6,3768.52 3869.82,3768.13
  region net ESP_BOOT: 3984.63,3971.18 3978.63,3971.18 3978.5,3972.71 3978.12,3973.93 3977.52,3974.94 3976.76,3975.81 3974.83,3977.48 3972.63,3979.59 3990.64,3979.59 3988.43,3977.48 3986.51,3975.81 3985.74,3974.94 3985.15,3973.93 3984.77,3972.71
  region net ESP_BAT_ADC: 3993.65,4157 3993.65,4163 3995.18,4163.13 3996.4,4163.52 3997.41,4164.11 3998.28,4164.88 3999.95,4166.8 4002.06,4169.01 4002.06,4150.99 3999.95,4153.2 3998.28,4155.12 3997.41,4155.89 3996.4,4156.48 3995.18,4156.87
  region net ESP_RGBLED: 4033.08,4184.11 4033.08,4190.11 4034.61,4190.25 4035.83,4190.63 4036.84,4191.22 4037.71,4191.99 4039.38,4193.91 4041.49,4196.12 4041.49,4178.11 4039.38,4180.31 4037.71,4182.24 4036.84,4183 4035.83,4183.6 4034.61,4183.98
  region net SYS_I2C_SCL: 4082.28,4173.76 4086.53,4178.01 4087.7,4177.02 4088.84,4176.43 4089.97,4176.13 4091.13,4176.06 4093.67,4176.24 4096.72,4176.31 4083.98,4163.57 4084.05,4166.62 4084.23,4169.16 4084.16,4170.32 4083.86,4171.45 4083.27,4172.59
  region net PA_EN: 3535,3874.65 3529,3874.65 3528.87,3876.18 3528.48,3877.4 3527.89,3878.41 3527.12,3879.28 3525.2,3880.95 3522.99,3883.06 3541.01,3883.06 3538.8,3880.95 3536.88,3879.28 3536.11,3878.41 3535.52,3877.4 3535.13,3876.18
  region net PA_EN: 3421.35,3668 3421.35,3662 3419.82,3661.87 3418.6,3661.48 3417.59,3660.89 3416.72,3660.12 3415.05,3658.2 3412.94,3655.99 3412.94,3674.01 3415.05,3671.8 3416.72,3669.88 3417.59,3669.11 3418.6,3668.52 3419.82,3668.13
  region net SYS_I2C_SCL: 3582,4013.6 3588,4018.5 3588.15,4017.07 3588.58,4015.79 3589.25,4014.64 3590.12,4013.6 3592.29,4011.76 3594.77,4010.09 3577.44,4005.2 3578.63,4007.14 3580.15,4009.3 3581.45,4011.51 3581.85,4012.58
  region net SYS_I2C_SDA: 3527,4084.56 3533,4087.87 3533.15,4086.41 3533.57,4085.15 3534.22,4084.05 3535.06,4083.06 3537.18,4081.27 3539.6,4079.46 3521.89,4076.15 3523.23,4078.02 3524.93,4080.22 3526.38,4082.5 3526.83,4083.57
  region net VDD_3V3: 4472.61,3780.53 4458.47,3794.67 4460.8,3796.69 4462.84,3798.33 4463.66,3799.21 4464.32,3800.22 4464.78,3801.45 4465.01,3802.98 4480.92,3787.07 4479.39,3786.84 4478.16,3786.38 4477.14,3785.72 4476.27,3784.9 4474.63,3782.87
  region net VDD_3V3: 4487.35,3823.55 4501.49,3809.41 4499.15,3807.39 4497.12,3805.75 4496.3,3804.87 4495.64,3803.86 4495.18,3802.63 4494.95,3801.1 4479.04,3817.01 4480.57,3817.24 4481.8,3817.7 4482.81,3818.36 4483.69,3819.18 4485.33,3821.21
  region net VDD_3V3: 3725,3979.41 3745,3979.41 3745.09,3976.76 3745.31,3974.26 3746,3969.88 3746.69,3966.66 3747.01,3965 3722.99,3965 3723.31,3966.66 3724,3969.88 3724.69,3974.26 3724.91,3976.76
  region net VDD_3V3: 3731.88,3947.74 3717.74,3961.88 3719.55,3963.81 3721.16,3965.75 3723.77,3969.33 3725.56,3972.1 3726.51,3973.49 3743.49,3956.51 3742.1,3955.56 3739.33,3953.77 3735.75,3951.16 3733.81,3949.55
  region net VDD_3V3: 3749.41,3975 3749.41,3955 3746.76,3954.91 3744.26,3954.69 3739.88,3954 3736.66,3953.31 3735,3952.99 3735,3977.01 3736.66,3976.69 3739.88,3976 3744.26,3975.31 3746.76,3975.09
  region net VDD_3V3: 3902.93,4053.79 3889.91,4069.06 3890.89,4069.72 3892.07,4070.13 3894.68,4070.58 3895.91,4070.81 3896.96,4071.18 3897.72,4071.8 3898.1,4072.76 3909.42,4059.19 3908.14,4059.13 3907.16,4058.81 3906.39,4058.28 3905.75,4057.58 3904.55,4055.81 3903.84,4054.81
  region net VDD_3V3: 4409.41,4205 4409.41,4185 4406.76,4184.91 4404.26,4184.69 4399.88,4184 4396.66,4183.31 4395,4182.99 4395,4207.01 4396.66,4206.69 4399.88,4206 4404.26,4205.31 4406.76,4205.09
  region net VDD_3V3: 3918.49,4282.37 3932.63,4296.51 3934.65,4294.17 3936.29,4292.14 3937.17,4291.32 3938.18,4290.66 3939.41,4290.2 3940.94,4289.97 3925.03,4274.06 3924.8,4275.59 3924.34,4276.82 3923.68,4277.83 3922.86,4278.71 3920.83,4280.35
  region net VDD_3V3: 3932.63,4253.49 3918.49,4267.63 3920.83,4269.65 3922.86,4271.29 3923.68,4272.17 3924.34,4273.18 3924.8,4274.41 3925.03,4275.94 3940.94,4260.03 3939.41,4259.8 3938.18,4259.34 3937.17,4258.68 3936.29,4257.86 3934.65,4255.83
  region net VDD_3V3: 3725,4175.59 3705,4175.59 3704.91,4178.24 3704.69,4180.74 3704,4185.12 3703.31,4188.34 3702.99,4190 3727.01,4190 3726.69,4188.34 3726,4185.12 3725.31,4180.74 3725.09,4178.24
  region net $1N13079: 3427,3971.35 3433,3971.35 3433.13,3969.82 3433.52,3968.6 3434.11,3967.59 3434.88,3966.72 3436.8,3965.05 3439.01,3962.94 3420.99,3962.94 3423.2,3965.05 3425.12,3966.72 3425.89,3967.59 3426.48,3968.6 3426.87,3969.82
  region net $1N13080: 3477,3991.35 3483,3991.35 3483.13,3989.82 3483.52,3988.6 3484.11,3987.59 3484.88,3986.72 3486.8,3985.05 3489.01,3982.94 3470.99,3982.94 3473.2,3985.05 3475.12,3986.72 3475.89,3987.59 3476.48,3988.6 3476.87,3989.82
  region net SYS_I2C_SCL: 3663,4320.69 3657,4320.69 3656.87,4322.22 3656.48,4323.44 3655.89,4324.45 3655.12,4325.32 3653.2,4326.99 3650.99,4329.1 3669.01,4329.1 3666.8,4326.99 3664.88,4325.32 3664.11,4324.45 3663.52,4323.44 3663.13,4322.22
  region net SYS_I2C_SDA: 3627.41,4321.24 3621.41,4321.24 3621.28,4322.77 3620.9,4323.99 3620.3,4325 3619.53,4325.87 3617.61,4327.53 3615.41,4329.65 3633.42,4329.65 3631.21,4327.53 3629.29,4325.87 3628.52,4325 3627.93,4323.99 3627.55,4322.77
  region net ESP_VDD_SPI: 4045.56,3881.32 4041.32,3885.56 4042.3,3886.74 4042.9,3887.87 4043.19,3889 4043.26,3890.16 4043.08,3892.7 4043.02,3895.75 4055.75,3883.02 4052.7,3883.08 4050.16,3883.26 4049,3883.19 4047.87,3882.9 4046.74,3882.3
  region net ESP_VDD_SPI: 3988.56,3832.8 3993.55,3829.3 3992.58,3828.14 3991.99,3826.99 3991.69,3825.82 3991.61,3824.62 3991.82,3822 3992.01,3818.96 3978.55,3830.93 3980.17,3831.03 3981.6,3830.99 3984.05,3830.84 3985.16,3830.91 3986.26,3831.2 3987.37,3831.8
  region net ESP_RGBLED: 3879.44,4168.68 3883.68,4164.44 3882.7,4163.26 3882.1,4162.13 3881.81,4161 3881.74,4159.84 3881.92,4157.3 3881.98,4154.25 3869.25,4166.98 3872.3,4166.92 3874.84,4166.74 3876,4166.81 3877.13,4167.1 3878.26,4167.7
  region net ESP_RGBLED: 3806.32,4214.44 3810.56,4218.68 3811.74,4217.7 3812.87,4217.1 3814,4216.81 3815.16,4216.74 3817.7,4216.92 3820.75,4216.98 3808.02,4204.25 3808.08,4207.3 3808.26,4209.84 3808.19,4211 3807.9,4212.13 3807.3,4213.26
  region net ESP_RGBLED: 3758,4523.65 3752,4523.65 3751.87,4525.18 3751.48,4526.4 3750.89,4527.41 3750.12,4528.28 3748.2,4529.95 3745.99,4532.06 3764.01,4532.06 3761.8,4529.95 3759.88,4528.28 3759.11,4527.41 3758.52,4526.4 3758.13,4525.18
  region net ESP_BAT_CHRG: 4106.88,3868.99 4114.38,3862.99 4113,3862.84 4111.69,3862.4 4110.47,3861.72 4109.34,3860.84 4108.31,3859.8 4107.4,3858.64 4105.97,3856.11 4098.47,3872.49 4100.58,3871.57 4102.63,3870.41 4104.69,3869.42 4105.77,3869.11
  region net ESP_BAT_CHRG: 4263.65,3862.99 4263.65,3868.99 4265.18,3869.13 4266.4,3869.51 4267.41,3870.1 4268.28,3870.87 4269.95,3872.79 4272.06,3875 4272.06,3856.99 4269.95,3859.19 4268.28,3861.12 4267.41,3861.88 4266.4,3862.48 4265.18,3862.86
  region net ESP_U0RXD: 4433.15,3843.51 4427.15,3843.51 4427.02,3845.04 4426.64,3846.26 4426.04,3847.27 4425.28,3848.14 4423.35,3849.8 4421.15,3851.91 4439.15,3851.91 4436.95,3849.8 4435.03,3848.14 4434.26,3847.27 4433.67,3846.26 4433.29,3845.04
  region net ESP_U0TXD: 4468,3843.66 4462,3843.66 4461.87,3845.19 4461.48,3846.41 4460.89,3847.42 4460.12,3848.29 4458.2,3849.95 4456,3852.06 4474,3852.06 4471.8,3849.95 4469.88,3848.29 4469.11,3847.42 4468.52,3846.41 4468.13,3845.19
  region net ESP_BAT_ADC: 4317,3783.2 4323,3783.2 4323.13,3781.68 4323.52,3780.46 4324.11,3779.45 4324.88,3778.58 4326.8,3776.91 4329,3774.8 4311,3774.8 4313.2,3776.91 4315.12,3778.58 4315.89,3779.45 4316.48,3780.46 4316.87,3781.68
  region net $1N13079: 3551,4338 3551,4344 3551.8,4344.2 3552.51,4344.73 3553.15,4345.5 3553.74,4346.44 3554.87,4348.43 3555.45,4349.31 3556.06,4350 3556.06,4332 3555.45,4332.69 3554.87,4333.57 3553.74,4335.56 3553.15,4336.5 3552.51,4337.27 3551.8,4337.8
  region net $1N13080: 3553.22,4288.98 3548.98,4293.22 3549.96,4294.39 3550.56,4295.53 3550.85,4296.66 3550.92,4297.82 3550.74,4300.35 3550.67,4303.4 3563.4,4290.67 3560.35,4290.74 3557.82,4290.92 3556.66,4290.85 3555.53,4290.56 3554.39,4289.96
  region net VOUT: 4517.63,3503.49 4503.49,3517.63 4505.83,3519.65 4507.86,3521.29 4508.68,3522.17 4509.34,3523.18 4509.8,3524.41 4510.03,3525.94 4525.94,3510.03 4524.41,3509.8 4523.18,3509.34 4522.17,3508.68 4521.29,3507.86 4519.65,3505.83
  region net VOUT: 4330.42,3390 4330.42,3370 4327.34,3370.23 4324.75,3370.5 4323.54,3370.47 4322.36,3370.21 4321.16,3369.67 4319.92,3368.75 4319.92,3391.25 4321.16,3390.33 4322.36,3389.79 4323.54,3389.53 4324.75,3389.5 4327.34,3389.77
  region net USB_VBUS: 4130.42,3455 4130.42,3435 4127.34,3435.23 4124.75,3435.5 4123.54,3435.47 4122.36,3435.21 4121.16,3434.67 4119.92,3433.75 4119.92,3456.25 4121.16,3455.33 4122.36,3454.79 4123.54,3454.53 4124.75,3454.5 4127.34,3454.77
  region net USB_VBUS: 4352.63,3498.49 4338.49,3512.63 4340.83,3514.65 4342.86,3516.29 4343.68,3517.17 4344.34,3518.18 4344.8,3519.41 4345.03,3520.94 4360.94,3505.03 4359.41,3504.8 4358.18,3504.34 4357.17,3503.68 4356.29,3502.86 4354.65,3500.83
  region net VDD_3V3: 3745,4005.86 cw(c3889.85,4005.86) 3787.43,4108.28 3777.43,4126.57 cw(c3701.35,4202.64) 3722.07,4097.07 3707.93,4082.93 cw(c3542.49,4005.86) 3725,4005.86
  region net VDD_3V3: 3861.67,3585 cw(c3761.67,3585) 3841.67,3525 3869.28,3515 3901.67,3525 cw(c3981.67,3585) 3881.67,3585
  region net VSYS: 3675,3550 cw(c3575,3550) 3655,3490 3685,3480 3715,3490 cw(c3795,3550) 3695,3550

## Silkscreen, mask and mechanical layers (free items; w line width, h text height)
Top Silkscreen Layer:
  text "小x宝-v0.9.9" at 3250,4540 h60 r270
  text "SDA" at 4085,4355 h30 r270
  text "GND" at 3710,4320 h30
  text "3V3" at 3780,4320 h30
  text "SCL" at 3935,4320 h30
  text "ESP32 C3" at 3955,4145 h30 r270
  text "ES8311" at 3710,4125 h30
  text "16M NOR FLASH" at 3790,3850 h30
  text "TP4057" at 4180,3665 h30
  text "VSYS" at 3650,3515 h30
  text "GND" at 3765,3515 h30
  text "3V3" at 3845,3515 h30
  text "RX" at 3930,3515 h30
  text "TX" at 4005,3515 h30
  text "NS4150B" at 3345,3495 h30
  text "+" at 3321.85,3188.01 h60
  text "+" at 4273,3186 h60